# EAGLE board ECGampl (EAGLE 7.6.0)
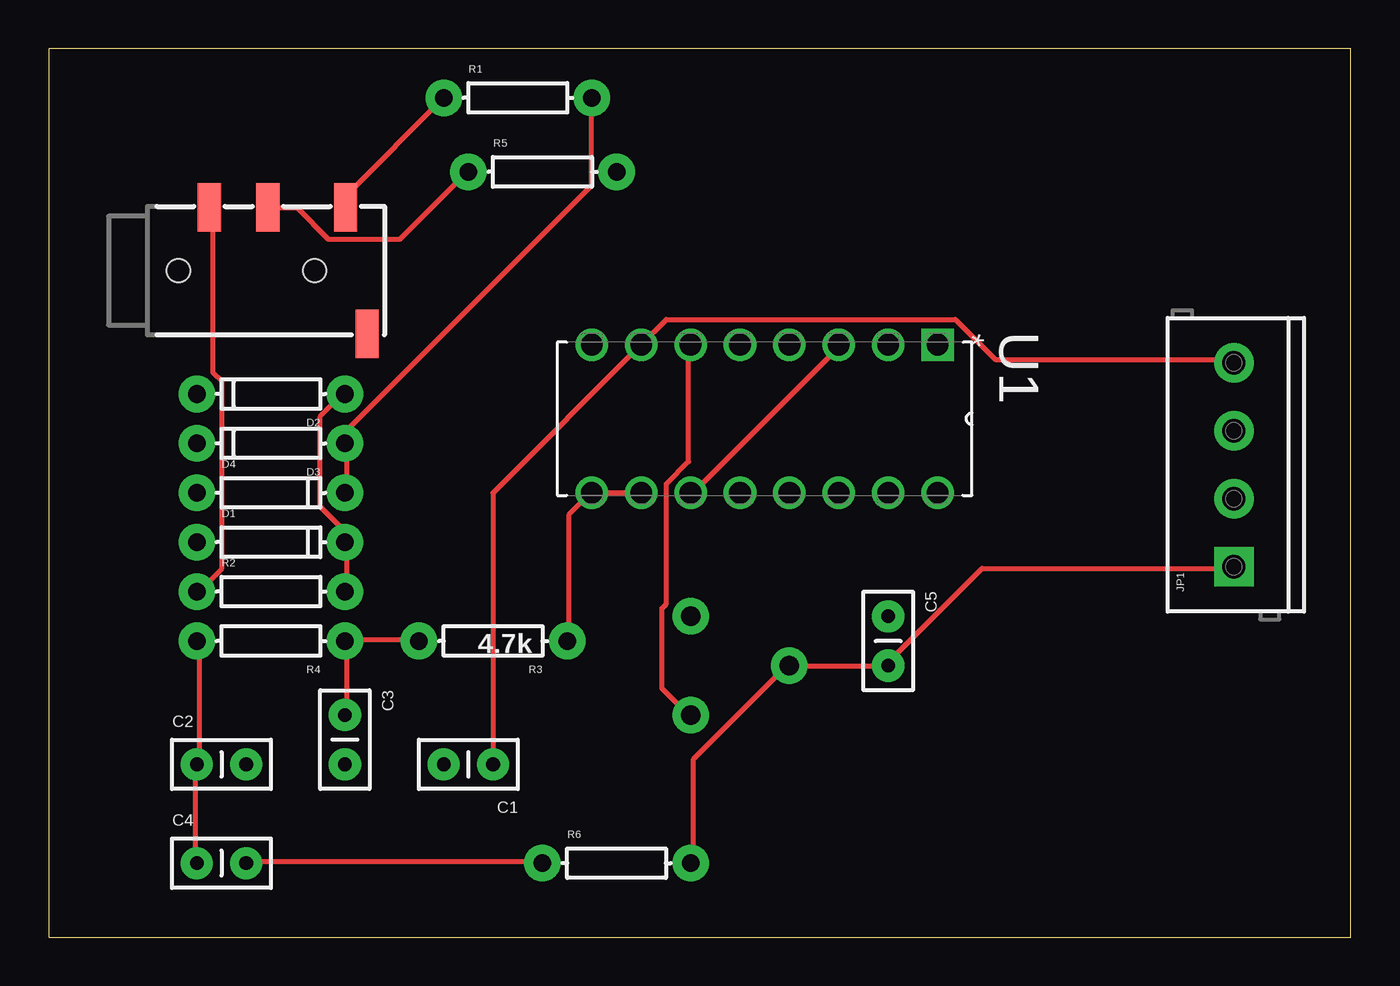
[diagram p0: board, top side]
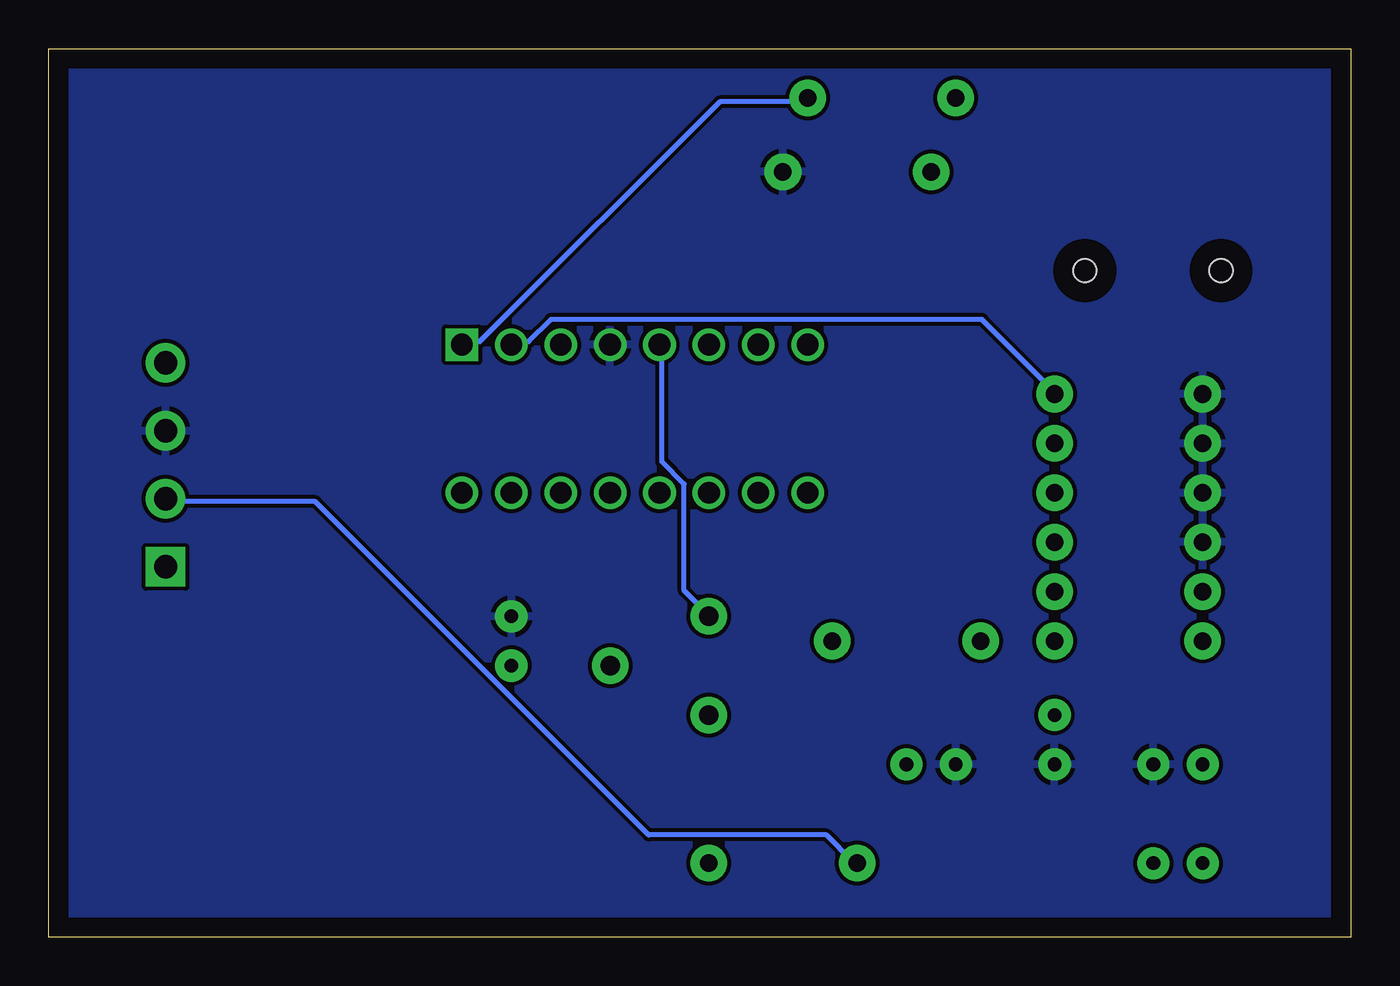
[diagram p1: board, bottom side, seen from below]

Size 66.98 x 45.71 mm. Coordinates in mm from the lower left corner, seen from the top.
Outline: 0,0 66.98,0 66.98,45.71 0,45.71 0,0
Copper layers (1*16): Top 0.035mm / dielectric 1.5mm / Bottom 0.035mm
Design rules "default": minimum track width 10mil, minimum drill 24mil, track to track 8mil, track to pad 8mil, pad to pad 8mil, via to via 8mil, smd to smd 8mil, copper to edge 40mil, drill to drill 8mil, minimum pad ring 10mil, minimum via ring 8mil, stop-mask expansion 4mil, vias tented up to drill 0mil, thermal gap 10mil

## Footprints (pad centres in the part's own frame; a part is rotated, then mirrored left to right if it is on the bottom)
CAP-PTH-SMALLEZ = drill 0.7 pad 1.651: 1 0,0; 2 2.54,0
DIODE-1N4148 = drill 0.9 pad 1.88: A -3.81,0; C 3.81,0
SCREWTERMINAL-3.5MM-4 = drill 1.2 pad 2.032 square: 1 0,0 | drill 1.2 pad 2.032: 2 3.5,0; 3 7,0; 4 10.5,0
AXIAL-0.3 = drill 0.9 pad 1.88: P$1 -3.81,0; P$2 3.81,0
TRIM_POT = drill 1 pad 1.88: 1 5.08,0; 2 0,2.54; 3 0,-2.54
DIP254P775X508-16 = drill 1.118 square: 1 -7.62,17.78 | drill 1.118: 2 -7.62,15.24; 3 -7.62,12.7; 4 -7.62,10.16; 5 -7.62,7.62; 6 -7.62,5.08; 7 -7.62,2.54; 8 -7.62,0; 9 0,0; 10 0,2.54; 11 0,5.08; 12 0,7.62; 13 0,10.16; 14 0,12.7; 15 0,15.24; 16 0,17.78
AUDIO-JACK-TRRS-SMD = smd 1.2 x 2.5: EARTH 11.3,-3.25; RING1 6.2,3.25; RING2 3.2,3.25; TIP 10.2,3.25 | hole 1.2: 1.6,0; 8.6,0

## Placement (x,y rotation side)
C1  [CAP-PTH-SMALLEZ]  22.86,8.89 180 top
C2  0.1uF  [CAP-PTH-SMALLEZ]  7.62,8.89 0 top
C3  1.0uF  [CAP-PTH-SMALLEZ]  15.24,11.43 270 top
C4  [CAP-PTH-SMALLEZ]  7.62,3.81 0 top
C5  [CAP-PTH-SMALLEZ]  43.18,16.51 270 top
D1  [DIODE-1N4148]  11.43,20.32 0 top
D2  [DIODE-1N4148]  11.43,27.94 180 top
D3  [DIODE-1N4148]  11.43,25.4 180 top
D4  [DIODE-1N4148]  11.43,22.86 0 top
JP1  [SCREWTERMINAL-3.5MM-4]  60.96,19.05 90 top
R1  [AXIAL-0.3]  24.13,43.18 0 top
R2  [AXIAL-0.3]  11.43,17.78 0 top
R3  4.7k  [AXIAL-0.3]  22.86,15.24 180 top
R4  [AXIAL-0.3]  11.43,15.24 180 top
R5  [AXIAL-0.3]  25.4,39.37 0 top
R6  [AXIAL-0.3]  29.21,3.81 0 top
RV1  [TRIM_POT]  33.02,13.97 0 top
U1  AD624ADZ  [DIP254P775X508-16]  27.94,22.86 270 top
U$1  AUDIO-JACK3  [AUDIO-JACK-TRRS-SMD]  5.08,34.29 0 top

## Library data of the parts
C1-C5 = SparkFun-Capacitors
D1-D4 = SparkFun-DiscreteSemi
JP1 U$1 = SparkFun-Connectors
R1-R6 = SparkFun-Resistors
RV1 = SparkFun-Electromechanical
U1 = ad624; MPN: AD624ADZ; OC_FARNELL: 1651279; OC_NEWARK: 13M6189; PACKAGE: DIP-16; SUPPLIER: Analog Devices

## Nets
+VS: U1.8
GND: C1.2 C2.2 C3.2 C5.1 D1.A D2.C D3.C D4.A JP1.3 R5.P$2 U1.4
IN1: R1.P$1 U$1.TIP
IN2: R2.P$1 U$1.RING2
N$1: U1.3 U1.11
N$2: R3.P$1 U1.9 U1.10
N$3: U1.16
N$4: C3.1 R3.P$2 R4.P$1
N$5: C2.1 C4.1 R4.P$2
N$6: RV1.2 U1.5
N$7: R5.P$1 U$1.RING1
N$9: RV1.3 U1.6
N$12: D1.C D2.A R2.P$2 U1.2
N$13: D3.A D4.C R1.P$2 U1.1
N$18: C4.2 JP1.2 R6.P$1
VDD: C5.2 JP1.1 R6.P$2 RV1.1
VSS: C1.1 JP1.4 U1.7

## Tracks (layer width: path | path; a pad name or v marks a point on that pad's centre or on a via)
GND
  pour Bottom: 0,45.72 67.31,45.72 67.31,0 0,0
IN1
  Top 0.254: R1.P$1 15.32,38.18 15.32,37.72 U$1.TIP
IN2
  Top 0.254: U$1.RING2 8.46,37.49 8.46,29.03 8.91,28.57 8.91,18.97 7.77,17.83 R2.P$1
N$1
  Top 0.254: U1.11 33.15,22.86 40.69,30.4 U1.3
N$2
  Top 0.254: U1.10 U1.9 27.89,22.86 26.75,21.72 26.75,15.32 R3.P$1
N$4
  Top 0.254: C3.1 15.32,11.43 15.32,15.09 R4.P$1 15.32,15.32 18.97,15.32 R3.P$2
N$5
  Top 0.254: C4.1 7.54,3.89 7.54,8.69 C2.1 7.77,8.91 7.77,15.09 R4.P$2
N$6
  Bottom 0.254: U1.5 35.43,30.4 35.43,24.46 34.29,23.32 34.29,17.83 33.15,16.69 RV1.2
N$7
  Top 0.254: U$1.RING1 11.43,37.49 12.8,37.49 14.4,35.89 18.06,35.89 21.49,39.32 R5.P$1
N$9
  Top 0.254: U1.6 32.92,30.4 32.92,24.46 31.77,23.32 31.77,17.14 31.55,16.92 31.55,12.8 32.92,11.43 RV1.3
N$12
  Top 0.254: R2.P$2 15.32,17.83 15.32,20.12 D1.C 15.09,20.34 15.09,21.03 13.95,22.17 13.95,26.75 15.09,27.89 D2.A
  Bottom 0.254: U1.2 42.98,30.63 42.29,30.63 41.15,31.77 18.97,31.77 15.32,28.12 D2.A
N$13
  Top 0.254: D4.C 15.32,22.86 15.32,25.38 D3.A 15.32,25.6 15.32,26.06 27.89,38.63 27.89,42.98 R1.P$2
  Bottom 0.254: U1.1 45.72,30.63 44.81,30.63 32.46,42.98 28.12,42.98 R1.P$2
N$18
  Top 0.254: C4.2 10.29,3.89 25.38,3.89 R6.P$1
  Bottom 0.254: JP1.2 60.81,22.4 53.26,22.4 36.12,5.26 26.98,5.26 25.6,3.89 R6.P$1
VDD
  Top 0.254: R6.P$2 33.15,3.89 33.15,9.14 37.95,13.95 RV1.1 38.18,13.95 42.98,13.95 C5.2 43.2,14.17 48.01,18.97 60.81,18.97 JP1.1
VSS
  Top 0.254: C1.1 22.86,22.86 U1.7 31.77,31.77 46.63,31.77 48.69,29.72 60.81,29.72 JP1.4